# Altium PCB sensors.PcbDoc
Units mm, origin at the board's own origin, x right, y up, seen from the top; angles counter-clockwise.
Board outline 19.5 x 11 mm, 2 copper layers (Top Layer, Bottom Layer); 3 components, 4 nets, 13 pads, 2 vias.
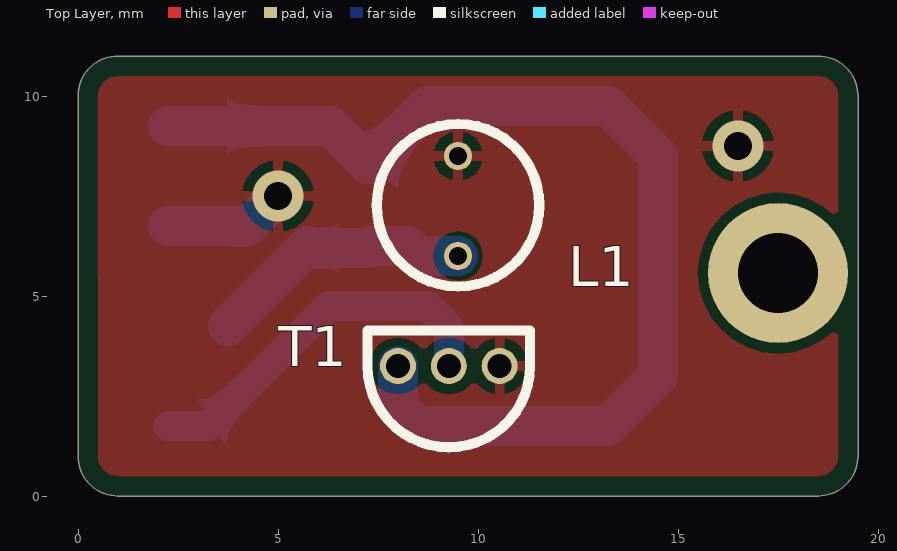
[diagram p0: Top Layer view]
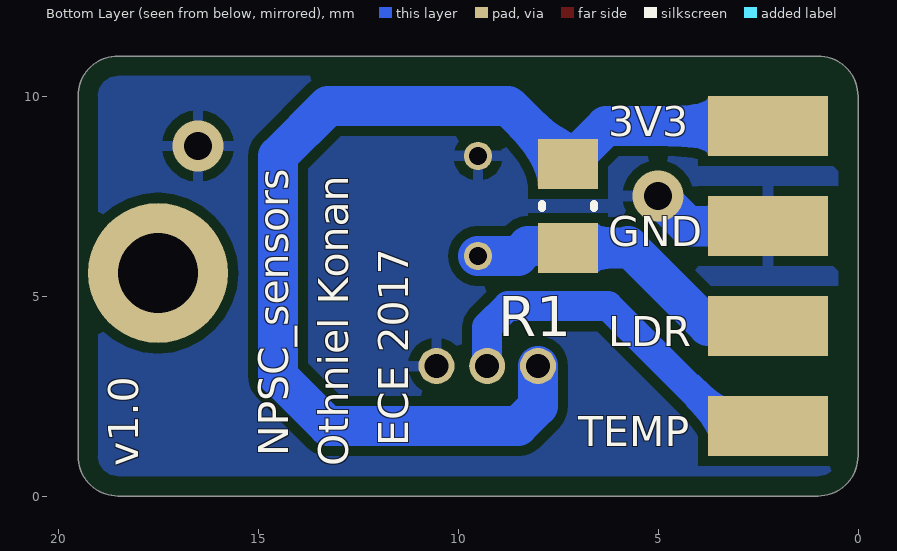
[diagram p1: Bottom Layer view, seen from below]

## Layer stack, top to bottom
Top Solder: solder mask 0.0102, Solder Resist, Dk 3.5
Top Layer: signal copper 0.0356
Dielectric 1: dielectric 0.32, FR-4, Dk 4.8
Bottom Layer: signal copper 0.0356
Bottom Solder: solder mask 0.0102, Solder Resist, Dk 3.5

## Board outline
0,1 0,10 cw(c1,10) 1,11 18.5,11 cw(c18.5,10) 19.5,10 19.5,1 cw(c18.5,1) 18.5,0 1,0 cw(c1,1)

## Design rules (kind name [scope] priority, off if disabled: settings)
Clearance [All] p1: gap=0.254
PolygonConnect [All] p1: connectstyle=Relief reliefconductorwidth=0.254 reliefentries=4 polygonreliefangle="90 Angle" airgapwidth=0.254
RoomDefinition sensors [InComponentClass('sensors')] p1: confinementstyle=ConfineIn formatcopy=TRUE lockcomponents=FALSE outline -5.25,-1 30.823,-1 30.823,16.252 -5.25,16.252
RoutingVias [All] p1: holewidth=0.711 width=1.27 viastyle="Through Hole" minholewidth=0.711 minwidth=1.27 maxholewidth=0.711 maxwidth=1.27
SolderMaskExpansion [All] p1: expansion=0.102
Width [All] p1: maxlimit=1 minlimit=0.254 preferedwidth=0.254
30 further rules are at their usual default settings.

## Components (designator, comment, footprint, x,y, rotation, side; value= is the part's Value field where it differs from the comment)
L1 "LDR" TO-18 9.5,6 r90 top
R1 "47K 5% 0805(2012)" RESC0805(2012)_M 7.25,7.25 r270 bottom
T1 "Temperature sensor" TO-92 8,3.25 r0 top

## Footprints (in the part's own frame and the unit in brackets; to place one, negate y for a bottom-side part, rotate by r counter-clockwise, add the part's x,y. Pads: shape width x height; smd on the part's side, far side on the other; paste and mask are expansions set on the pad)
RESC0805(2012)_M [mm] "Chip Resistor, Body 2.0x1.3mm, IPC Low Density"
  rect 1.25x1.5 smd: 1(-1.05,0) 2(1.05,0)
  silkscreen extent -0.05,-0.65 0.05,0.65, body extent -1.1,-0.67 1.1,0.67, height 0.7
TO-18 [mm]
  round 0.71 hole 0.45: 1(0,0) 1(0,0) 2(2.5,0)
  silkscreen extent -0.76,-2.03 3.3,2.03
TO-92 [mm]
  round 0.9 hole 0.6: 1(0,0) 2(1.27,0) 3(2.54,0)
  silkscreen extent -0.76,-2.03 3.3,0.89

## Part data
L1: library part "NSL -19M51"
R1: library part CMP-1013-00954-1, "8M45 0.125W 1% 0805 (2012 Metric)  SMD"
T1: library part MCP9700

## Free pads (board coordinates)
  round 3.5 hole 2: 0(17.5,5.575)
  rect 3x1.5 smd far side: 1(2.25,9.25) 2(2.25,6.75) 3(2.25,4.25) 4(2.25,1.75)

## Via types
v1: diameter 1.27, hole 0.711, Top Layer to Bottom Layer, tented both sides, 2 vias

## Nets (pads, with @x,y where several pads share a name; then routed paths per layer and width w, separated by ;. In a path a pad name is that pad's centre, name@x,y a point inside that pad or via, vN(x,y) a via of type N, cw(c..) or ccw(c..) an arc to the next point about the centre after c; other vN are vias at no path point)
3V3: pad.1 R1.1 T1.1 | length 27.4
  Bottom Layer w1: pad.1 6.3,9.25 R1.1 ; R1.1@7.292,8.3 8.746,9.754 13.246,9.754 14.5,8.5 14.5,3 13.25,1.75 8.5,1.75 8,2.25 T1.1
GND: L1.2 pad.2 T1.3 | length 3.1
  Bottom Layer w1: pad.2 4.25,6.75 v1(5,7.5)
  other v1: 16.5,8.75
LDR: L1.1 pad.3 R1.2 | length 6.7
  Bottom Layer w1: pad.3@3.75,4.25 5.75,6.25 5.8,6.2 R1.2 7.3,6.25 8.25,6.25 8.5,6 L1.1@9.5,6
TEMP: pad.4 T1.2 | length 9.5
  Bottom Layer w0.75: pad.4 3.25,1.75 6.25,4.75 8.75,4.75 9.27,4.23 T1.2

## Polygon pours and split planes (outlines as drawn)
GND on Top Layer "Top Layer-No Net" (solid, remove dead copper, pour order 6): 1,0.5 cw(c1,1) 0.5,1 0.5,10 cw(c1,10) 1,10.5 18.5,10.5 cw(c18.5,10) 19,10 19,1 cw(c18.5,1) 18.5,0.5
GND on Bottom Layer "Top Layer-No Net1" (solid, remove dead copper, pour order 8): 1,0.5 cw(c1,1) 0.5,1 0.5,10 cw(c1,10) 1,10.5 18.5,10.5 cw(c18.5,10) 19,10 19,1 cw(c18.5,1) 18.5,0.5

## Silkscreen, mask and mechanical layers (free items; w line width, h text height)
Bottom Overlay:
  text "3V3" at 6.25,9 h0.75
  text "GND" at 6.25,6.25 h0.75
  text "LDR" at 6.25,3.75 h0.75
  text "TEMP" at 7,1.25 h0.75
  text "ECE 2017" at 11.25,1.25 h0.75 r270
  text "NPSC_sensors" at 14.25,1 h0.75 r270
  text "Othniel Konan" at 12.75,0.75 h0.75 r270
  text "v1.0" at 18,0.75 h0.75 r270
Mechanical 1:
  the board outline again, w0.254